# Altium PCB PCB1.PcbDoc
Units mm, origin at the board's own origin, x right, y up, seen from the top; angles counter-clockwise.
Board outline 152.4 x 101.6 mm, 2 copper layers (Top Layer, Bottom Layer); 13 components, 0 nets, 58 pads, 0 vias.
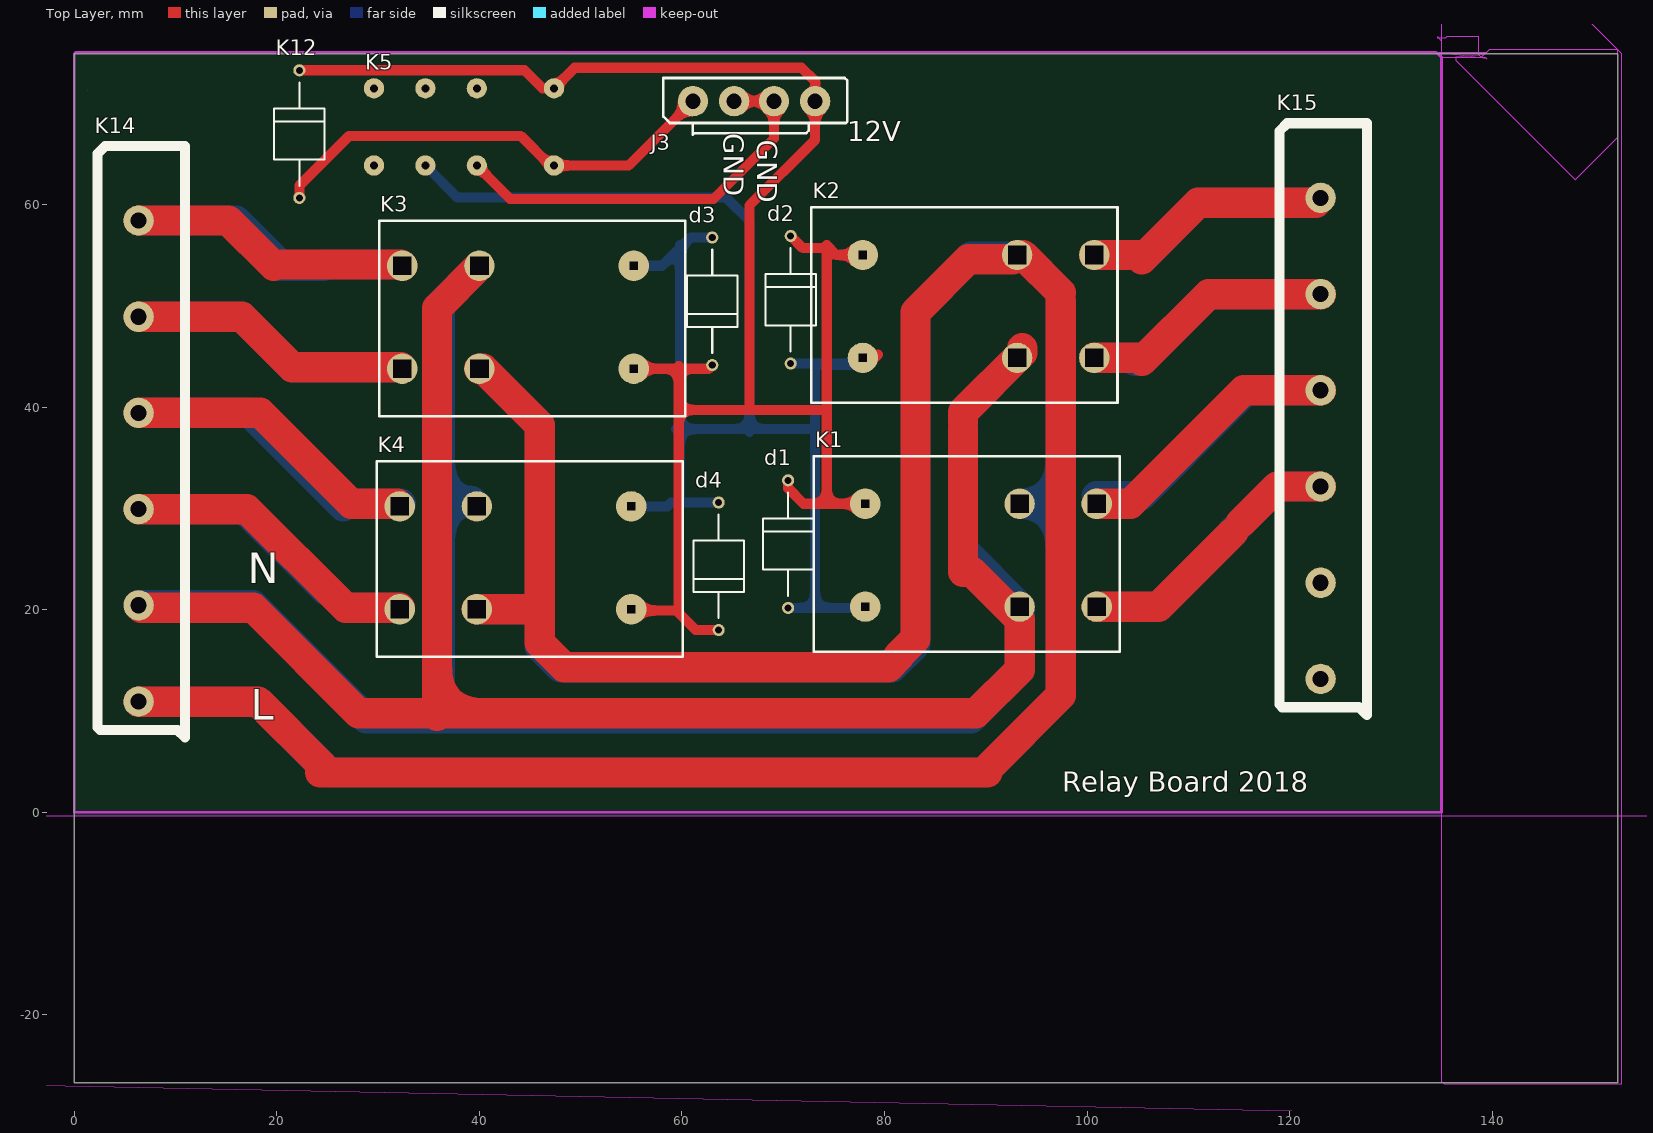
[diagram p0: Top Layer view]
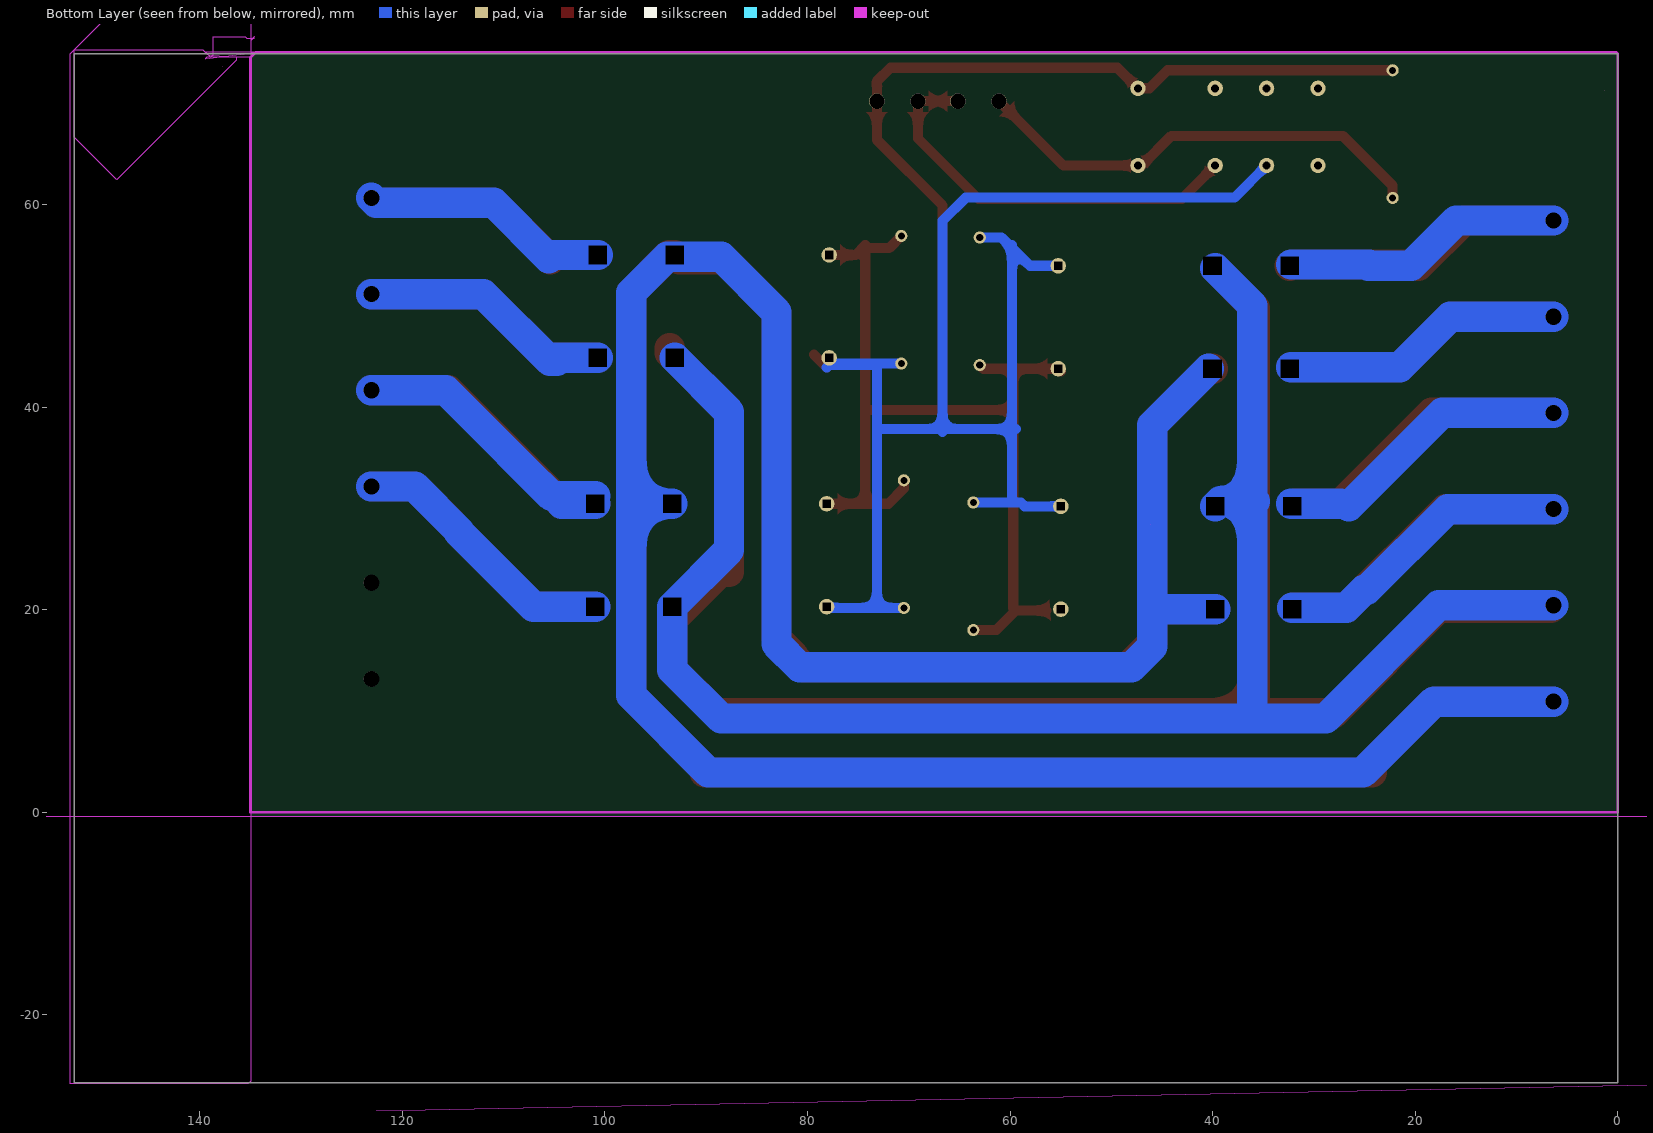
[diagram p1: Bottom Layer view, seen from below]

## Layer stack, top to bottom
Top Solder: solder mask 0.0102, Solder Resist, Dk 3.5
Top Layer: signal copper 0.0356
Dielectric 1: dielectric 0.32, FR-4, Dk 4.8
Bottom Layer: signal copper 0.0356
Bottom Solder: solder mask 0.0102, Solder Resist, Dk 3.5

## Board outline
0,-26.67 152.4,-26.67 152.4,74.93 0,74.93
cut-out: -3.492,-27.051 -3.365,-26.924 200.144,-31.103 161.061,-0.381 -3.492,-0.381
cut-out: 0,-26.67
cut-out: 0,0.635
cut-out: 134.62,76.581 135.001,76.2 135.001,74.549 138.938,74.549 138.684,74.803 138.684,76.581 135.509,76.581 135.382,76.454 134.62,76.454
cut-out: 137.795,73.66
cut-out: 134.493,75.057 139.446,75.057 138.938,74.549 139.319,74.549 139.446,74.422
cut-out: 135.001,80.842 135.001,-26.543 135.255,-26.797 152.781,-26.797 152.781,74.93 146.371,81.34
cut-out: 143.891,78.232
cut-out: 136.398,74.549 136.398,74.295 148.209,62.484 152.4,66.675 152.4,75.311 139.7,75.311 139.192,74.803
cut-out: 1.27,71.247
cut-out: 46.101,28.448

## Design rules (kind name [scope] priority, off if disabled: settings)
Clearance [All] p1: gap=0.254 ignorepadtopadclearanceinfootprint=FALSE except(0: Arc-Hole Track-Hole SMDPad-Hole THPad-Hole Via-Hole Fill-Hole Poly-Hole Region-Hole Text-Hole)
PolygonConnect [All] p1: connectstyle=Relief reliefconductorwidth=0.254 reliefentries=4 polygonreliefangle="90 Angle" airgapwidth=0.254
RoutingVias [All] p1: holewidth=0.711 width=1.27 viastyle="Through Hole" minholewidth=0.711 minwidth=1.27 maxholewidth=0.711 maxwidth=1.27
SolderMaskExpansion [All] p1: expansion=0.102
Width [All] p1: maxlimit=0.254 minlimit=0.254 preferedwidth=0.254
30 further rules are at their usual default settings.

## Components (designator, comment, footprint, x,y, rotation, side; value= is the part's Value field where it differs from the comment)
d1 "Comment" Diode 70.485,20.193 r90 top
d2 "Comment" Diode 70.739,44.323 r90 top
d3 "Comment" Diode 62.992,56.769 r270 top
d4 "Comment" Diode 63.627,30.607 r270 top
J3 "Comment" con4 61.087,70.231 r0 top
K1 "Comment" G4W-2212P-US-TV5 78.105,30.48 r0 top
K2 "Comment" G4W-2212P-US-TV5 77.861,55.045 r0 top
K3 "Comment" G4W-2212P-US-TV5 55.245,43.815 r180 top
K4 "Comment" G4W-2212P-US-TV5 54.991,20.066 r180 top
K5 "Comment" GV5-2 47.371,63.881 r180 top
K12 "Comment" Diode 22.225,60.679 r90 top
K14 "Comment" Connect 6.35,10.947 r90 top
K15 "Comment" Connect 123.063,13.181 r90 top

## Footprints (in the part's own frame and the unit in brackets; to place one, negate y for a bottom-side part, rotate by r counter-clockwise, add the part's x,y. Pads: shape width x height; smd on the part's side, far side on the other; paste and mask are expansions set on the pad)
con4 [mm]
  round 3 / inner round 4 / far side round 1.524 hole 1.5: 1(0,0) 2(4.064,0) 3(8.001,0) 4(12.065,0)
  silkscreen extent -2.92,-3.3 15.24,2.29
Connect [mm]
  round 3 / inner round 4 / far side round 1.524 hole 1.6: 1(0,0) 2(9.5,0) 3(19,0) 5(28.5,0) 7(38,0) 8(47.5,0)
  silkscreen extent -3.56,-4.57 54.86,4.06
Diode [mm]
  round 1.2 hole 0.7: A(0,0) K(12.6,0)
  silkscreen extent 1.2,-2.5 11.4,2.5
G4W-2212P-US-TV5 [mm]
  round 3 / inner round 4 / far side round 1.524 hole 0.8 square: 1(0,0) 2(0,-10.16)
  round 3 / inner round 4 / far side round 1.524 hole 1.8 square: 3(15.24,0) 4(15.24,-10.16) 5(22.86,0) 6(22.86,-10.16)
  silkscreen extent -5.08,-14.6 25.15,4.7
GV5-2 [mm]
  round 2 / inner round 4 / far side round 1.524 hole 0.8: 1(0,0) 4(7.62,0) 6(12.7,0) 8(17.78,0) 9(17.78,-7.62) 11(12.7,-7.62) 13(7.62,-7.62) 16(0,-7.62)

## Nets (pads, with @x,y where several pads share a name; then routed paths per layer and width w, separated by ;. In a path a pad name is that pad's centre, name@x,y a point inside that pad or via, vN(x,y) a via of type N, cw(c..) or ccw(c..) an arc to the next point about the centre after c; other vN are vias at no path point)
pads on no net: d1.A d1.K d2.A d2.K d3.A d3.K d4.A d4.K J3.1 J3.2 J3.3 J3.4 K1.1 K1.2 K1.3 K1.4 K1.5 K1.6 K2.1 K2.2 K2.3 K2.4 K2.5 K2.6 K3.1 K3.2 K3.3 K3.4 K3.5 K3.6 K4.1 K4.2 K4.3 K4.4 K4.5 K4.6 K5.1 K5.4 K5.6 K5.8 K5.9 K5.11 K5.13 K5.16 K12.A K12.K K14.1 K14.2 K14.3 K14.5 K14.7 K14.8 K15.1 K15.2 K15.3 K15.5 K15.7 K15.8
copper on no net: | length 1765.5
  Top Layer w1: 22.225,61.722 22.225,60.679 22.225,61.879 27.148,66.802 32.512,66.802 44.069,66.802 46.99,63.881 47.371,63.881 54.737,63.881 61.087,70.231 ; 22.225,73.279 44.45,73.279 46.228,71.501 47.371,71.501 49.403,73.533 71.812,73.533 73.152,72.193 73.152,70.231 73.152,66.421 66.675,59.944 66.675,40.005 ; 39.751,63.881 43.053,60.579 63.119,60.579 69.088,66.548 69.088,70.231 65.151,70.231 ; 54.991,43.561 55.245,43.815 62.638,43.815 ; 56.388,19.939 59.436,19.939 61.368,18.007 63.627,18.007 ; 59.69,20.193 59.69,44.069 ; 59.69,39.751 74.041,39.751 ; 70.485,32.793 70.485,32.004 72.009,30.48 78.105,30.48 74.295,30.48 74.295,56.007 ; 70.739,56.923 71.939,55.723 74.011,55.723 74.689,55.045 ; 74.295,45.339 74.295,56.007 ; 77.861,55.045 75.257,55.045 74.295,56.007 ; 78.105,43.942 79.375,45.212 ; 62.638,43.815 62.992,44.169 62.638,43.815
  Top Layer w3: 6.35,10.947 18.136,10.947 24.384,4.699 ; 6.35,29.947 17.043,29.947 26.797,20.193 32.131,20.193 ; 6.35,39.447 18.365,39.447 27.332,30.48 31.877,30.48 ; 6.35,48.947 16.534,48.947 21.539,43.942 25.908,43.942 32.258,43.942 ; 6.35,58.447 15.213,58.447 19.685,53.975 ; 6.604,20.193 17.653,20.193 28.067,9.779 34.417,9.779 88.392,9.779 89.027,9.779 93.345,14.097 93.345,19.05 88.646,23.749 87.757,23.749 87.757,37.846 ; 20.523,54.102 24.511,54.102 32.258,54.102 32.385,53.975 ; 24.257,3.937 27.94,3.937 90.17,3.937 90.17,4.318 97.409,11.557 97.409,50.419 ; 35.814,9.525 35.814,49.784 ; 36.068,50.038 39.751,53.721 ; 39.751,20.066 45.72,20.066 45.974,20.32 ; 40.005,43.815 40.386,43.815 45.974,38.227 45.974,16.764 48.387,14.351 80.391,14.351 81.407,15.367 81.407,15.494 83.058,17.145 83.058,49.403 88.265,54.61 92.665,54.61 93.101,55.045 93.672,55.045 97.409,51.308 ; 87.757,38.481 87.757,39.542 93.599,45.384 93.599,45.847 ; 100.721,44.885 105.102,44.885 ; 100.721,55.045 105.337,55.045 ; 100.965,20.32 107.061,20.32 114.427,27.686 ; 100.965,30.48 104.267,30.48 115.468,41.681 123.063,41.681 ; 105.41,44.577 112.014,51.181 123.063,51.181 ; 105.41,54.61 110.998,60.198 122.58,60.198 ; 115.189,28.575 118.795,32.181 123.063,32.181
  Bottom Layer w1: 34.671,63.881 37.846,60.706 41.402,60.706 64.389,60.706 66.675,58.42 66.675,37.592 ; 54.991,30.226 58.547,30.226 58.928,30.607 63.627,30.607 ; 55.245,53.975 56.107,53.975 58.039,53.975 60.833,56.769 62.992,56.769 ; 59.436,30.607 59.817,30.988 59.817,56.007 ; 59.436,37.846 72.898,37.846 ; 70.485,20.193 77.978,20.193 78.105,20.32 ; 70.739,44.323 77.724,44.323 77.851,44.196 ; 73.152,20.193 73.152,44.196 77.851,44.196 ; 78.105,43.942 77.851,44.196
  Bottom Layer w3: 6.35,10.947 18.136,10.947 25.146,3.937 27.94,3.937 89.789,3.937 97.409,11.557 97.409,51.308 93.853,54.864 88.519,54.864 83.058,49.403 83.058,16.637 80.772,14.351 48.006,14.351 45.974,16.383 45.974,38.227 40.386,43.815 ; 6.35,20.447 17.653,20.447 28.829,9.271 32.258,9.271 33.274,9.271 36.576,9.271 ; 6.35,29.947 16.789,29.947 24.765,21.971 25.019,21.971 26.797,20.193 32.131,20.193 ; 6.35,39.447 17.322,39.447 26.543,30.226 ; 6.35,48.947 16.534,48.947 21.539,43.942 27.178,43.942 31.369,43.942 32.258,43.942 ; 6.35,58.447 15.924,58.447 20.269,54.102 ; 20.396,53.975 24.638,53.975 ; 24.511,54.102 32.258,54.102 ; 27.332,30.48 31.877,30.48 ; 31.623,30.48 32.258,30.48 ; 35.814,30.734 39.243,30.734 39.751,30.226 ; 36.068,50.038 36.068,9.271 87.376,9.271 88.519,9.271 93.345,14.097 93.345,20.32 87.757,25.908 87.757,38.481 87.757,39.542 93.101,44.885 ; 36.195,50.165 39.751,53.721 ; 39.751,20.066 45.72,20.066 45.974,20.32 ; 93.345,30.48 97.409,30.48 ; 100.721,44.885 105.102,44.885 ; 100.721,55.045 105.337,55.045 ; 100.965,20.32 107.061,20.32 114.427,27.686 114.427,27.813 118.795,32.181 123.063,32.181 ; 100.965,30.48 104.267,30.48 ; 100.965,31.242 105.283,31.242 107.893,33.852 111.334,37.293 115.722,41.681 123.063,41.681 ; 104.775,44.577 105.41,44.577 111.76,50.927 ; 105.537,54.737 110.998,60.198 122.58,60.198 123.063,60.681 ; 112.014,51.181 117.348,51.181 123.063,51.181

## Keep-outs
Keep-Out Layer:
  lines w0.254: 0,0 135.001,0 135.001,74.549 134.493,75.057 0.127,75.057 0,74.93 0,0

## Silkscreen, mask and mechanical layers (free items; w line width, h text height)
Top Overlay:
  text "GND" at 64.135,67.056 h2 r270
  text "GND" at 67.437,66.421 h2 r270
  text "12V" at 76.327,66.294 h2
  text "N" at 17.145,22.606 h3
  text "L" at 17.399,9.144 h3
  text "Relay Board 2018" at 97.536,2.032 h2